# EAGLE board BeagleBrasse_cape (EAGLE 6.5.0)
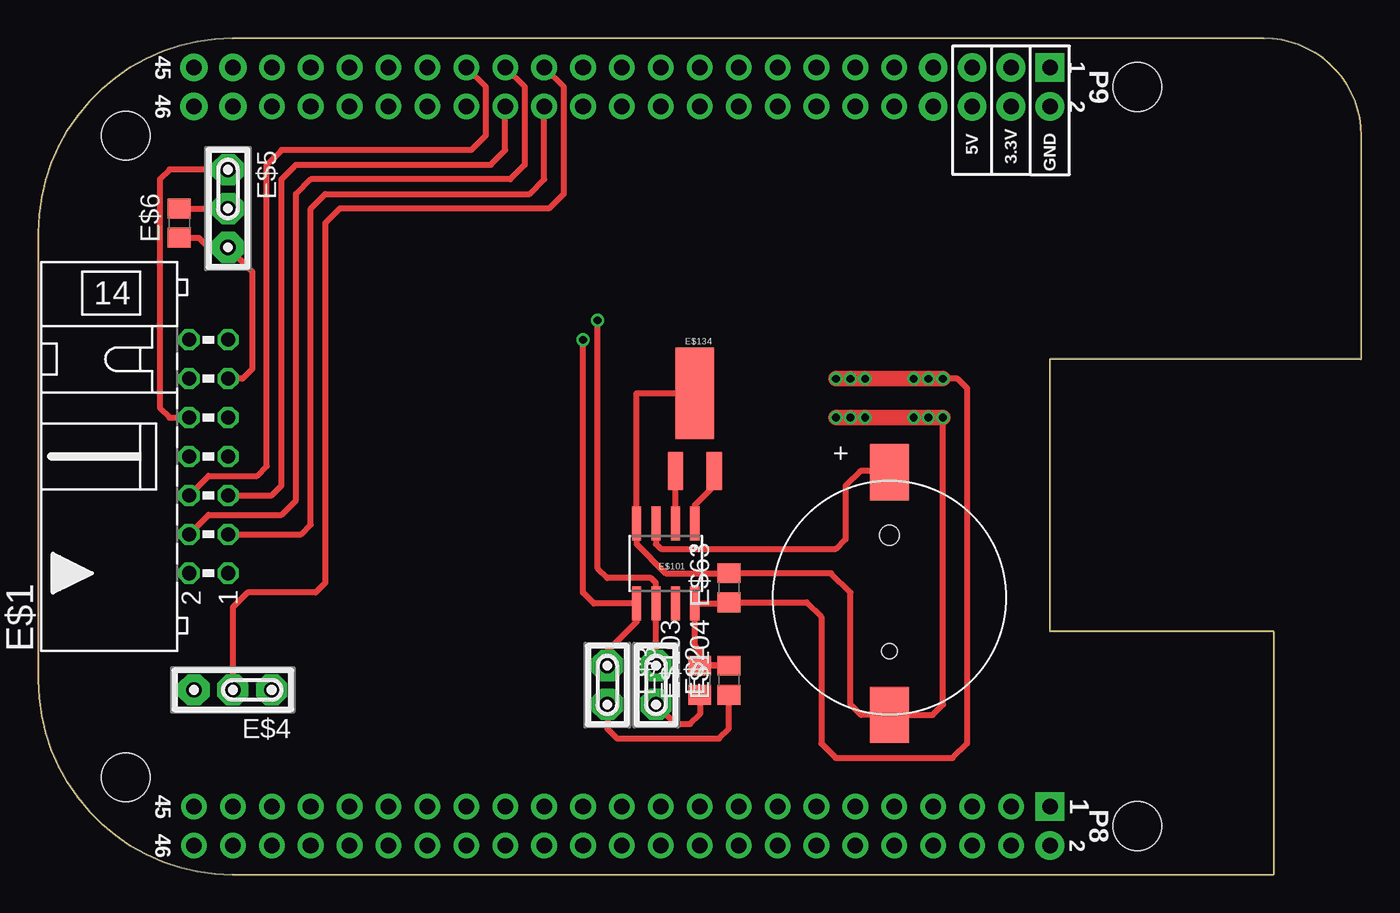
[diagram p0: board, top side]
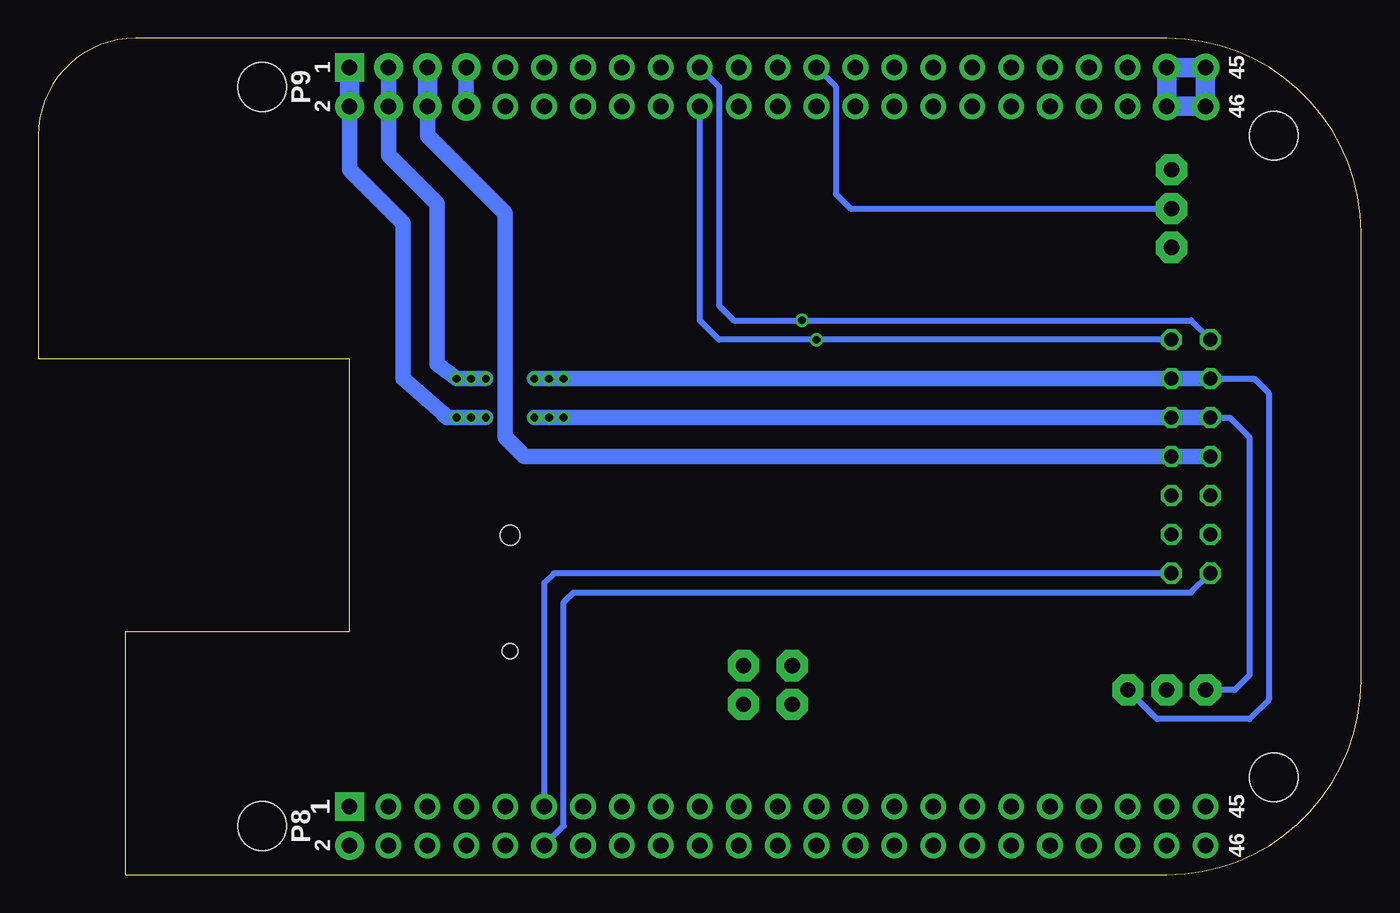
[diagram p1: board, bottom side, seen from below]

Size 86.36 x 54.61 mm. Coordinates in mm from the lower left corner, seen from the top.
Outline: 86.36,48.26 86.36,33.66 66.04,33.66 66.04,15.88 80.64,15.88 80.64,0 12.7,0 arc-90 0,12.7 0,41.91 arc-90 12.7,54.61 80.01,54.61 arc-90 86.36,48.26
Copper layers (1*16): Top 0.0356mm / dielectric 1.5011mm / Bottom 0.0356mm
Design rules "LaenPCBOrder": minimum track width 6mil, minimum drill 13mil, track to track 6mil, track to pad 6mil, pad to pad 6mil, via to via 6mil, smd to smd 6mil, copper to edge 15mil, drill to drill 6mil, minimum pad ring 7mil, minimum via ring 7mil, stop-mask expansion 3mil, vias tented up to drill 0mil, thermal gap 10mil
Net classes: 0 default: clearance 0.205 mm

## Footprints (pad centres in the part's own frame; a part is rotated, then mirrored left to right if it is on the bottom)
ML14L = drill 0.914 octagon: 1 -7.62,-1.27; 2 -7.62,1.27; 3 -5.08,-1.27; 4 -5.08,1.27; 5 -2.54,-1.27; 6 -2.54,1.27; 7 0,-1.27; 8 0,1.27; 9 2.54,-1.27; 10 2.54,1.27; 11 5.08,-1.27; 12 5.08,1.27; 13 7.62,-1.27; 14 7.62,1.27
JP02N = drill 0.991 pad 2.032 octagon: 1 -1.27,0; 2 1.27,0
JP03N = drill 0.991 pad 2.032 octagon: 1 -2.54,0; 2 0,0; 3 2.54,0
C0805 = smd 1.3 x 1.5: 1 -0.95,0; 2 0.95,0
SOIC8 = smd 0.61 x 2.21: 1 -1.905,-2.616; 2 -0.635,-2.616; 3 0.635,-2.616; 4 1.905,-2.616; 5 1.905,2.616; 6 0.635,2.616; 7 -0.635,2.616; 8 -1.905,2.616
BC501SM = smd 3.658 x 2.54: P$1 -7.671,0; P$2 8.179,0 | hole 1: -3.505,0 | hole 1.3: 4.064,0
CRYSTAL-32KHZ-SMD = smd 2.5 x 6: SHEILD 0,5.08 | smd 1 x 2.5: X1 -1.27,0; X2 1.27,0
BEAGLE_BONE_BLACK_CAPE = drill 1.016 pad 1.88 square: P8.1 20.32,50.165; P9.1 20.32,1.905 | drill 1.016 pad 1.88: P8.2 20.32,52.705; P9.2 20.32,4.445; P9.3 22.86,1.905; P9.4 22.86,4.445; P9.5 25.4,1.905; P9.6 25.4,4.445; P9.7 27.94,1.905; P9.8 27.94,4.445 | drill 1.016 pad 1.676: P8.3 22.86,50.165; P8.4 22.86,52.705; P8.5 25.4,50.165; P8.6 25.4,52.705; P8.7 27.94,50.165; P8.8 27.94,52.705; P8.9 30.48,50.165; P8.10 30.48,52.705; P8.11 33.02,50.165; P8.12 33.02,52.705; P8.13 35.56,50.165; P8.14 35.56,52.705; P8.15 38.1,50.165; P8.16 38.1,52.705; P8.17 40.64,50.165; P8.18 40.64,52.705; P8.19 43.18,50.165; P8.20 43.18,52.705; P8.21 45.72,50.165; P8.22 45.72,52.705; P8.23 48.26,50.165; P8.24 48.26,52.705; P8.25 50.8,50.165; P8.26 50.8,52.705; P8.27 53.34,50.165; P8.28 53.34,52.705; P8.29 55.88,50.165; P8.30 55.88,52.705; P8.31 58.42,50.165; P8.32 58.42,52.705; P8.33 60.96,50.165; P8.34 60.96,52.705; P8.35 63.5,50.165; P8.36 63.5,52.705; P8.37 66.04,50.165; P8.38 66.04,52.705; P8.39 68.58,50.165; P8.40 68.58,52.705; P8.41 71.12,50.165; P8.42 71.12,52.705; P8.43 73.66,50.165; P8.44 73.66,52.705; P8.45 76.2,50.165; P8.46 76.2,52.705; P9.9 30.48,1.905; P9.10 30.48,4.445; P9.11 33.02,1.905; P9.12 33.02,4.445; P9.13 35.56,1.905; P9.14 35.56,4.445; P9.15 38.1,1.905; P9.16 38.1,4.445; P9.17 40.64,1.905; P9.18 40.64,4.445; P9.19 43.18,1.905; P9.20 43.18,4.445; P9.21 45.72,1.905; P9.22 45.72,4.445; P9.23 48.26,1.905; P9.24 48.26,4.445; P9.25 50.8,1.905; P9.26 50.8,4.445; P9.27 53.34,1.905; P9.28 53.34,4.445; P9.29 55.88,1.905; P9.30 55.88,4.445; P9.31 58.42,1.905; P9.32 58.42,4.445; P9.33 60.96,1.905; P9.34 60.96,4.445; P9.35 63.5,1.905; P9.36 63.5,4.445; P9.37 66.04,1.905; P9.38 66.04,4.445; P9.39 68.58,1.905; P9.40 68.58,4.445; P9.41 71.12,1.905; P9.42 71.12,4.445 | drill 1.016 pad 1.778: P9.43 73.66,1.905; P9.44 73.66,4.445; P9.45 76.2,1.905; P9.46 76.2,4.445 | hole 3.175: 14.605,3.175; 80.645,6.35; 80.645,48.26; 14.605,51.435

## Placement (x,y rotation side)
E$1  [ML14L]  11.11,27.3 90 top
E$2  [JP02N]  40.32,12.38 270 top
E$3  [JP02N]  37.15,12.38 270 top
E$4  [JP03N]  12.7,12.06 180 top
E$5  [JP03N]  12.38,43.5 270 top
E$6  4.7K  [C0805]  9.21,42.55 90 top
E$63  0.1  [C0805]  45.09,18.73 90 top
E$101  DS1338  [SOIC8]  40.96,20.32 180 top
E$102  [BC501SM]  55.56,18.1 90 top
E$103  4.7K  [C0805]  43.18,12.7 90 top
E$104  4.7K  [C0805]  45.09,12.7 90 top
E$134  32.768  [CRYSTAL-32KHZ-SMD]  42.86,26.35 0 top
U$1  BEAGLE_BONE_BLACK_CAPE  [BEAGLE_BONE_BLACK_CAPE]  86.36,54.61 180 top

## Library data of the parts
E$1 = con-harting-ml
E$2-E$5 = connectors
E$6 E$63 E$103 E$104 = ref-packages
E$101 = SparkFun-AnalogIC
E$102 = cedric
E$134 = SparkFun-FreqCtrl
U$1 = SparkFun-Boards

## Nets
S$1: E$1.7 E$1.8 U$1.P9.5 U$1.P9.6
S$2: E$101.2 E$134.X1
S$3: E$101.1 E$134.X2
S$4: E$101.3 E$102.P$2
S$5: E$1.14 E$2.1 E$101.6 U$1.P9.19
S$6: E$1.13 E$3.1 E$101.5 U$1.P9.20
S$7: E$1.3 U$1.P9.28
S$8: E$4.2 U$1.P9.27
S$9: E$3.2 E$104.1
S$10: E$2.2 E$103.1
S$11: U$1.P9.7 U$1.P9.8
S$12: E$5.2 E$6.2 U$1.P9.25
S$13: E$1.5 U$1.P9.30
S$14: E$1.4 U$1.P9.29
S$15: E$1.1 U$1.P8.11
S$16: E$1.2 U$1.P8.12
S$17: E$1.9 E$1.10 E$4.3 E$5.1 E$63.2 E$101.4 E$102.P$1 E$134.SHEILD U$1.P9.1 U$1.P9.2
S$18: E$1.6 U$1.P9.31
S$19: E$1.11 E$1.12 E$4.1 E$5.3 E$6.1 E$63.1 E$101.8 E$103.2 E$104.2 U$1.P9.3 U$1.P9.4
S$31: U$1.P9.43 U$1.P9.44 U$1.P9.45 U$1.P9.46

## Tracks (layer width: path | path; a pad name or v marks a point on that pad's centre or on a via)
S$1
  Bottom 1.016: U$1.P9.6 60.96,48.26 55.88,43.18 55.88,28.57 54.61,27.3 E$1.7 E$1.8
  Bottom 1.27: U$1.P9.5 U$1.P9.6
S$2
  Top 0.406: E$101.2 E$134.X1
S$3
  Top 0.406: E$134.X2 44.13,25.4 42.86,24.13 E$101.1
S$4
  Top 0.305: E$102.P$2 55.24,26.35
  Top 0.406: E$101.3 40.32,21.59 40.64,21.27 52.07,21.27 52.7,21.91 52.7,25.4 53.66,26.35 55.24,26.35
S$5  (via drill 0.5)
  Top 0.406: E$2.1 E$101.6 40.32,19.05 40.01,19.37 37.15,19.37 36.51,20 v36.51,36.2
  Bottom 0.406: U$1.P9.19 41.91,51.44 41.91,37.15 40.96,36.2 v36.51,36.2 11.11,36.2 E$1.14
S$6  (via drill 0.5)
  Top 0.406: E$3.1 37.15,14.61 39.05,16.51 E$101.5 36.27,17.7 35.56,18.41 v35.56,34.92
  Bottom 0.406: E$1.13 v35.56,34.92 41.91,34.92 43.18,36.2 U$1.P9.20
S$7
  Top 0.406: U$1.P9.28 33.02,45.4 32.07,44.45 18.73,44.45 17.78,43.5 17.78,22.86 17.14,22.23 E$1.3
S$8
  Top 0.406: U$1.P9.27 34.29,51.44 34.29,44.45 33.34,43.5 19.68,43.5 18.73,42.55 18.73,19.05 18.1,18.41 13.65,18.41 12.7,17.46 E$4.2
S$9
  Top 0.406: E$3.2 37.15,9.53 37.78,8.89 44.45,8.89 45.09,9.53 E$104.1
S$10
  Top 0.406: E$2.2 41.59,9.84 42.55,9.84 43.18,10.48 E$103.1
S$11
  Bottom 1.016: U$1.P9.7 U$1.P9.8
S$12
  Top 0.406: E$6.2 E$5.2
  Bottom 0.406: U$1.P9.25 34.29,51.44 34.29,44.45 33.34,43.5 E$5.2
S$13
  Top 0.406: U$1.P9.30 30.48,47.31 29.53,46.35 16.83,46.35 15.88,45.4 15.88,25.4 15.24,24.77 E$1.5
S$14
  Top 0.406: E$1.4 11.11,23.5 15.88,23.5 16.83,24.45 16.83,44.45 17.78,45.4 30.8,45.4 31.75,46.35 31.75,51.44 U$1.P9.29
S$15
  Bottom 0.406: E$1.1 52.7,19.68 53.34,19.05 U$1.P8.11
S$16
  Bottom 0.406: U$1.P8.12 52.07,3.17 52.07,17.78 51.44,18.41 11.11,18.41 E$1.2
S$17  (via drill 0.5)
  Top 0.305: E$63.2
  Top 0.406: E$134.SHEILD 39.05,31.43 E$101.4 39.05,21.59 40.96,19.68 E$63.2 | v52.07,29.84 56.2,29.84 v59.05,29.84 59.05,11.11 58.37,10.43 E$102.P$1 53.71,10.43 53.02,11.11 53.02,18.41 51.75,19.68 E$63.2 | E$5.1 8.57,46.04 7.94,45.4 7.94,30.48 8.57,29.84 E$1.10
  Top 1.016: v52.07,29.84 v53.02,29.84 v53.98,29.84 56.2,29.84 v57.15,29.84 v58.1,29.84 v59.05,29.84
  Bottom 0.406: E$1.10 8.57,29.84 7.3,28.57 7.3,13.02 8.26,12.06 E$4.3
  Bottom 1.016: E$1.10 E$1.9 v52.07,29.84 v53.02,29.84 v53.98,29.84 | U$1.P9.2 66.04,46.04 62.55,42.55 62.55,32.38 60.01,30.16 59.69,29.84 v59.05,29.84 v58.1,29.84 v57.15,29.84
  Bottom 1.27: U$1.P9.1 U$1.P9.2
S$18
  Top 0.406: E$1.6 11.11,26.04 14.29,26.04 14.92,26.67 14.92,46.35 15.88,47.31 28.26,47.31 29.21,48.26 29.21,51.44 U$1.P9.31
S$19  (via drill 0.5)
  Top 0.406: E$103.2 E$104.2 E$103.2 43.18,14.6 42.86,14.92 E$101.8 45.01,17.7 E$63.1 50.16,17.78 51.12,16.83 51.12,8.57 52.07,7.62 59.69,7.62 60.64,8.57 60.64,31.75 60.01,32.38 v59.05,32.38 | E$1.11 13.34,32.38 13.97,33.02 13.97,39.37 E$5.3 11.11,40.96 10.47,41.59 E$6.1
  Top 1.016: v52.07,32.38 v53.02,32.38 v53.98,32.38 v57.15,32.38 v58.1,32.38 v59.05,32.38
  Bottom 0.406: E$1.12 6.99,32.38 6.03,31.43 6.03,11.43 7.3,10.16 13.34,10.16 E$4.1
  Bottom 1.016: E$1.12 E$1.11 v52.07,32.38 v53.02,32.38 v53.98,32.38 | U$1.P9.3 U$1.P9.4 63.5,46.99 60.33,43.81 60.33,33.34 v59.05,32.38 v58.1,32.38 v57.15,32.38
S$31
  Bottom 1.27: U$1.P9.43 U$1.P9.44 U$1.P9.46 U$1.P9.45 U$1.P9.43

## Text on the board
tPlace: 3.3V | 5V | GND